# Altium PCB Horn.PcbDoc
Units mm, origin at the board's own origin, x right, y up, seen from the top; angles counter-clockwise.
Board outline 152.4 x 101.6 mm, 2 copper layers (Top Layer, Bottom Layer); 10 components, 24 nets, 72 pads, 10 vias.
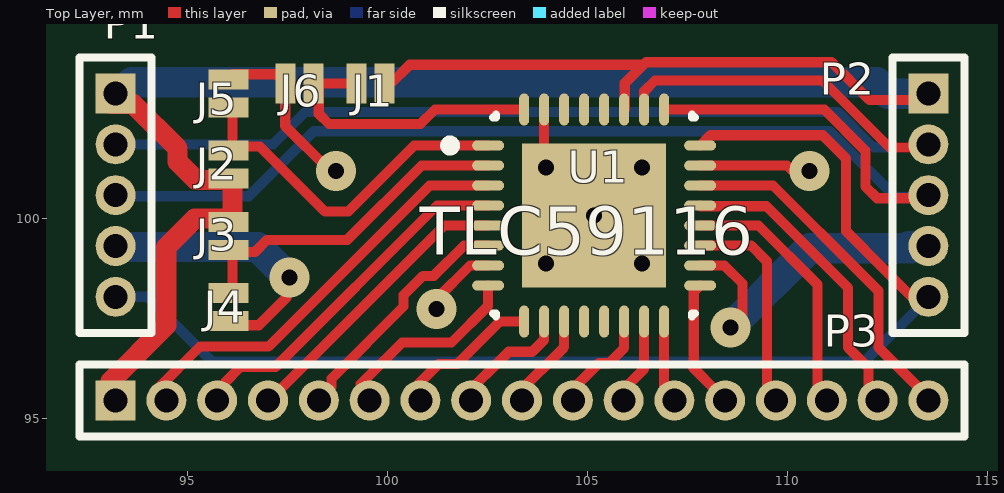
[diagram p0: Top Layer view]
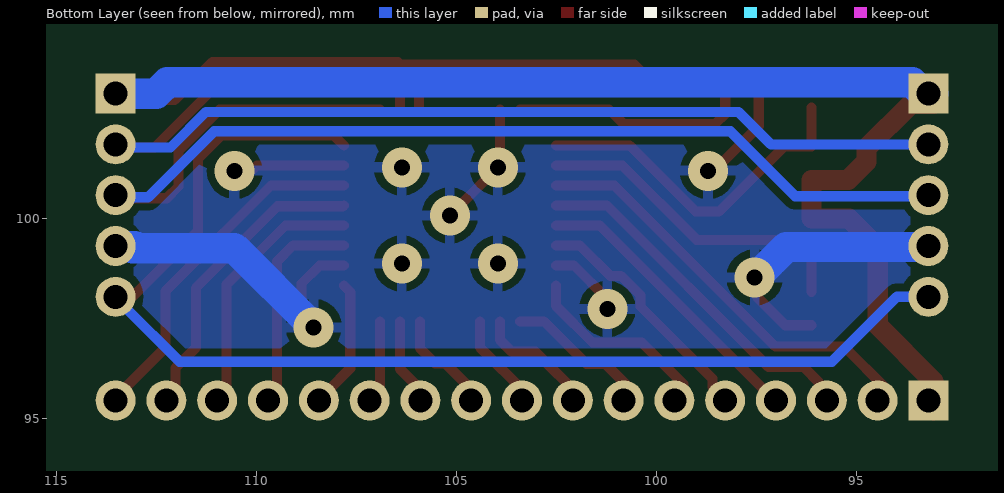
[diagram p1: Bottom Layer view, seen from below]

## Layer stack, top to bottom
Top Layer: signal copper 0.0356
Dielectric: dielectric 0.32, FR-4, Dk 4.8
Bottom Layer: signal copper 0.0356

## Board outline
25.4,25.146 177.8,25.146 177.8,126.746 25.4,126.746

## Design rules (kind name [scope] priority, off if disabled: settings)
Clearance [All] p1: gap=0.2
PolygonConnect [All] p1: connectstyle=Relief reliefconductorwidth=0.254 reliefentries=4 polygonreliefangle="90 Angle"
RoomDefinition Horn [InComponentClass('Horn')] p1: confinementstyle=ConfineIn formatcopy=TRUE lockcomponents=FALSE outline 83.261,76.073 137.617,76.073 137.617,119.761 83.261,119.761
RoutingVias [All] p1: holewidth=0.4 width=1 viastyle="Through Hole" minholewidth=0.4 minwidth=1 maxholewidth=0.711 maxwidth=1.27
SilkscreenOverComponentPads [All] p1: minsilkscreentomaskgap=0.254
SolderMaskExpansion [All] p1: expansion=0.102
Width [All] p1: maxlimit=0.762 minlimit=0.2 preferedwidth=0.2
27 further rules are at their usual default settings.

## Components (designator, comment, footprint, x,y, rotation, side; value= is the part's Value field where it differs from the comment)
J1 "Jamper" Jumper 99.568,103.378 r270 top
J2 "Jamper" Jumper 96.012,101.346 r180 top
J3 "Jamper" Jumper 96.012,99.568 r0 top
J4 "Jamper" Jumper 96.012,97.79 r180 top
J5 "Jamper" Jumper 96.012,103.124 r0 top
J6 "Jamper" Jumper 97.79,103.378 r90 top
P1 "MHDR1X5" MHDR1X5 93.193,103.124 r270 top
P2 "MHDR1X5" MHDR1X5 113.513,103.124 r270 top
P3 "MHDR1X17" MHDR1X17 93.193,95.453 r0 top
U1 "TLC59116" QFN50P500X500X100-32N 105.156,100.076 r0 top

## Footprints (in the part's own frame and the unit in brackets; to place one, negate y for a bottom-side part, rotate by r counter-clockwise, add the part's x,y. Pads: shape width x height; smd on the part's side, far side on the other; paste and mask are expansions set on the pad)
Jumper [mm]
  rect 1x0.5 smd: 1(0,-0.35) 2(0,0.35)
MHDR1X5 [mm] "Connector; Header; 5 Position"
  rect 1x1 hole 0.6: 1(0,0)
  round 1 hole 0.6: 2(1.27,0) 3(2.54,0) 4(3.81,0) 5(5.08,0)
  silkscreen extent -0.9,-0.9 5.98,0.9
MHDR1X17 [mm] "Connector; Header; 17 Position"
  rect 1x1 hole 0.6: 1(0,0)
  round 1 hole 0.6: 2(1.27,0) 3(2.54,0) 4(3.81,0) 5(5.08,0) 6(6.35,0) 7(7.62,0) 8(8.89,0) 9(10.16,0) 10(11.43,0) 11(12.7,0) 12(13.97,0) 13(15.24,0) 14(16.51,0) 15(17.78,0) 16(19.05,0) 17(20.32,0)
  silkscreen extent -0.9,-0.9 21.22,0.9
QFN50P500X500X100-32N [mm] "QFN, 32-Leads, Body 4,8x4,8mm (max), Pitch 0,50mm, IPC Medium Density"
  oval 0.8x0.25 smd: 1(-2.65,1.75) 2(-2.65,1.25) 3(-2.65,0.75) 4(-2.65,0.25) 5(-2.65,-0.25) 6(-2.65,-0.75) 7(-2.65,-1.25) 8(-2.65,-1.75) 17(2.65,-1.75) 18(2.65,-1.25) 19(2.65,-0.75) 20(2.65,-0.25) 21(2.65,0.25) 22(2.65,0.75) 23(2.65,1.25) 24(2.65,1.75)
  oval 0.25x0.8 smd: 9(-1.75,-2.65) 10(-1.25,-2.65) 11(-0.75,-2.65) 12(-0.25,-2.65) 13(0.25,-2.65) 14(0.75,-2.65) 15(1.25,-2.65) 16(1.75,-2.65) 25(1.75,2.65) 26(1.25,2.65) 27(0.75,2.65) 28(0.25,2.65) 29(-0.25,2.65) 30(-0.75,2.65) 31(-1.25,2.65) 32(-1.75,2.65)
  rect 3.6x3.6 smd: 33(0,0)
  silkscreen extent -3.72,-2.53 2.53,2.52, body extent -2.42,-2.43 2.43,2.42, height 1

## Part data
P1 P2: "Header, 5-Pin"
P3: "Header, 17-Pin"
U1: library part TLC59116FIRHBR

## Via types
v1: diameter 1, hole 0.4, Top Layer to Bottom Layer, tented top, 5 vias
v2: diameter 1, hole 0.4, Top Layer to Bottom Layer, 5 vias

## Nets (pads, with @x,y where several pads share a name; then routed paths per layer and width w, separated by ;. In a path a pad name is that pad's centre, name@x,y a point inside that pad or via, vN(x,y) a via of type N, cw(c..) or ccw(c..) an arc to the next point about the centre after c; other vN are vias at no path point)
GND: J4.2 J5.2 J6.2 P1.4 P2.4 U1.7 U1.18 U1.23 U1.31 U1.33 | length 26.9
  Top Layer w0.254: J4.2@96.114,97.333 96.774,97.333 97.46,98.019 97.46,98.577 97.511,98.527 v2(97.536,98.527) ; J5.2@96.114,103.607 97.206,103.607 97.434,103.378 97.434,102.311 98.476,101.27 v2@98.501,101.27 ; v2(101.219,97.739) 101.219,97.994 102.051,98.826 U1.7 ; U1.31 103.906,101.326 v1(103.956,101.276) v1(105.156,100.076) ; U1.18 108.413,98.826 108.864,98.374 108.864,97.587 v2(108.56,97.282) ; U1.23 109.977,101.326 110.414,100.889 v2@110.414,101.016
  Bottom Layer w0.762: P1.4@93.294,99.289 96.749,99.289 97.511,98.527 v2(97.536,98.527) ; v2(108.56,97.282) 110.541,99.263 113.081,99.263 113.03,99.314 P2.4@113.284,99.314
  other v1: 103.956,98.876 106.356,98.876 106.356,101.276
  other v2: 98.704,101.194 110.541,101.194
NetJ1_1: J1.1 J6.1 U1.32 | length 7.1
  Top Layer w0.254: J1.1@99.238,103.378 98.273,103.378 98.273,102.616 98.527,102.362 100.813,102.362 101.177,102.726 U1.32
NetJ2_1: J2.1 J5.1 U1.1 | length 8.7
  Top Layer w0.254: J2.1@96.114,101.803 96.799,101.803 98.425,100.178 99.013,100.178 100.661,101.826 U1.1 ; J2.1@96.114,101.826 J5.1@96.114,102.768
NetJ3_1: J3.1 J4.1 U1.2 | length 8.3
  Top Layer w0.254: J4.1@96.114,98.171 96.114,99.162 96.672,99.162 96.977,99.466 98.984,99.466 100.843,101.326 U1.2
NetP3_2: P3.2 U1.3 | length 10.9
  Top Layer w0.254: P3.2@94.234,95.25 94.234,95.733 95.301,96.799 97.018,96.799 101.045,100.826 U1.3
NetP3_3: P3.3 U1.4 | length 9.5
  Top Layer w0.254: P3.3@95.504,95.25 95.918,95.25 95.918,95.893 96.317,96.291 97.193,96.291 101.227,100.326 U1.4
NetP3_4: P3.4 U1.5 | length 7.6
  Top Layer w0.254: P3.4@96.774,95.25 96.834,95.25 101.41,99.826 U1.5
NetP3_5: P3.5 U1.6 | length 6.4
  Top Layer w0.254: P3.5@98.044,95.25 98.589,95.795 98.589,95.998 100.392,97.801 100.392,98.082 100.876,98.566 101.149,98.566 101.909,99.326 U1.6
NetP3_6: P3.6 U1.8 | length 5.1
  Top Layer w0.254: P3.6@99.314,95.25 99.314,95.86 100.355,96.901 101.591,96.901 102.506,97.816 U1.8
NetP3_7: P3.7 U1.9 | length 4
  Top Layer w0.254: P3.7@100.584,95.25 100.584,95.682 101.27,96.368 101.74,96.368 102.798,97.426 U1.9
NetP3_8: P3.8 U1.10 | length 3.4
  Top Layer w0.254: P3.8@101.854,95.25 101.854,95.504 103.02,96.67 103.605,96.67 103.906,96.971 U1.10
NetP3_9: P3.9 U1.11 | length 3
  Top Layer w0.254: P3.9@103.124,95.25 103.378,95.25 103.226,95.402 103.226,95.606 104.406,96.786 U1.11
NetP3_10: P3.10 U1.14 | length 3
  Top Layer w0.254: P3.10@104.394,95.25 104.394,95.504 105.274,96.384 105.528,96.384 105.906,96.762 U1.14
NetP3_11: P3.11 U1.15 | length 2.5
  Top Layer w0.254: P3.11@105.664,95.25 105.664,95.504 106.406,96.246 U1.15
NetP3_12: P3.12 U1.16 | length 2.2
  Top Layer w0.254: U1.16 106.906,95.278 P3.12@106.934,95.25
NetP3_13: P3.13 U1.17 | length 3.4
  Top Layer w0.254: U1.17 107.645,98.165 107.645,96.255 108.204,95.696 P3.13@108.204,95.25
NetP3_14: P3.14 U1.19 | length 5.5
  Top Layer w0.254: U1.19 109.081,99.326 109.474,98.933 P3.14@109.474,95.25
NetP3_15: P3.15 U1.20 | length 6.6
  Top Layer w0.254: U1.20 109.263,99.826 110.744,98.345 P3.15@110.744,95.25
NetP3_16: P3.16 U1.21 | length 7.8
  Top Layer w0.254: U1.21 107.823,100.309 109.463,100.309 111.463,98.309 111.463,98.306 111.506,98.263 111.506,96.774 112.014,96.266 P3.16@112.014,95.25
NetP3_17: P3.17 U1.22 | length 8.9
  Top Layer w0.254: U1.22 109.628,100.826 111.946,98.509 111.946,98.506 112.268,98.183 112.268,96.774 113.284,95.758 P3.17@113.284,95.25
RESET: P1.5 P2.5 U1.24 | length 30.3
  Top Layer w0.254: U1.24 108.063,102.083 110.871,102.083 111.455,101.498 111.455,99.682 112.428,98.709 112.428,98.706 113.284,97.85 P2.5@113.284,97.79
  Bottom Layer w0.254: P1.5@93.066,97.79 93.32,98.044 93.98,98.044 95.606,96.418 111.912,96.418 113.284,97.79 P2.5@113.284,98.044
SCL: P1.3 P2.3 U1.25 | length 29.7
  Top Layer w0.254: U1.25 110.91,102.726 111.938,101.698 111.938,100.8 112.23,100.508 113.106,100.508 P2.3@113.284,100.33
  Bottom Layer w0.254: P1.3@93.066,100.33 93.294,100.559 96.52,100.559 98.146,102.184 111.049,102.184 112.7,100.533 113.081,100.533 P2.3@113.284,100.33
SDA: P1.2 P2.2 U1.26 | length 29.3
  Top Layer w0.254: U1.26 106.406,103.181 106.678,103.453 110.866,103.453 112.541,101.778 113.106,101.778 P2.2@113.284,101.6
  Bottom Layer w0.254: P1.2@93.066,101.6 93.32,101.854 97.13,101.854 97.942,102.667 111.252,102.667 112.141,101.778 113.106,101.778 P2.2@113.284,101.6
VCC: J1.2 J2.2 J3.2 P1.1 P2.1 P3.1 U1.27 | length 46.9
  Top Layer w0.254: J1.2@100.076,103.378 100.544,103.846 106.389,103.846 105.923,103.381 105.923,102.743 U1.27 ; 106.45,103.907 111.094,103.907 112.037,102.964 113.19,102.964 P2.1@113.284,102.87
  Top Layer w0.508: P3.1@93.066,95.199 93.066,95.936 94.463,97.333 94.463,99.289 95.174,100 96.114,100 96.114,100.965 95.199,100.965 94.742,101.422 94.742,101.752 93.624,102.87 P1.1@93.066,102.87
  Bottom Layer w0.762: P1.1@93.066,103.124 93.32,103.124 93.599,103.403 112.217,103.403 112.497,103.124 P2.1@113.03,103.124
pads on no net: U1.12 U1.13 U1.28 U1.29 U1.30

## Polygon pours and split planes (outlines as drawn)
GND on Bottom Layer "Bottom Layer-No Net" (solid, remove dead copper, pour order 2): 93.066,103.886 114.046,103.886 114.046,96.52 93.066,96.52

## Silkscreen, mask and mechanical layers (free items; w line width, h text height)
Mechanical 1:
  lines w0.254: 92.2,94.45 92.2,104.446 114.5,104.446 114.5,94.45 92.2,94.45

## Dimensions
92.2,104.446 to 92.2,94.45 on Mechanical 15
114.5,104.446 to 92.2,104.446 on Mechanical 15